# Altium PCB PCB2.PcbDoc
Units mil, origin at the board's own origin, x right, y up, seen from the top; angles counter-clockwise.
Board outline 3700 x 4025 mil, 2 copper layers (Top Layer, Bottom Layer); 66 components, 57 nets, 326 pads, 11 vias.
Unrouted connection lines stored in the file: 60.
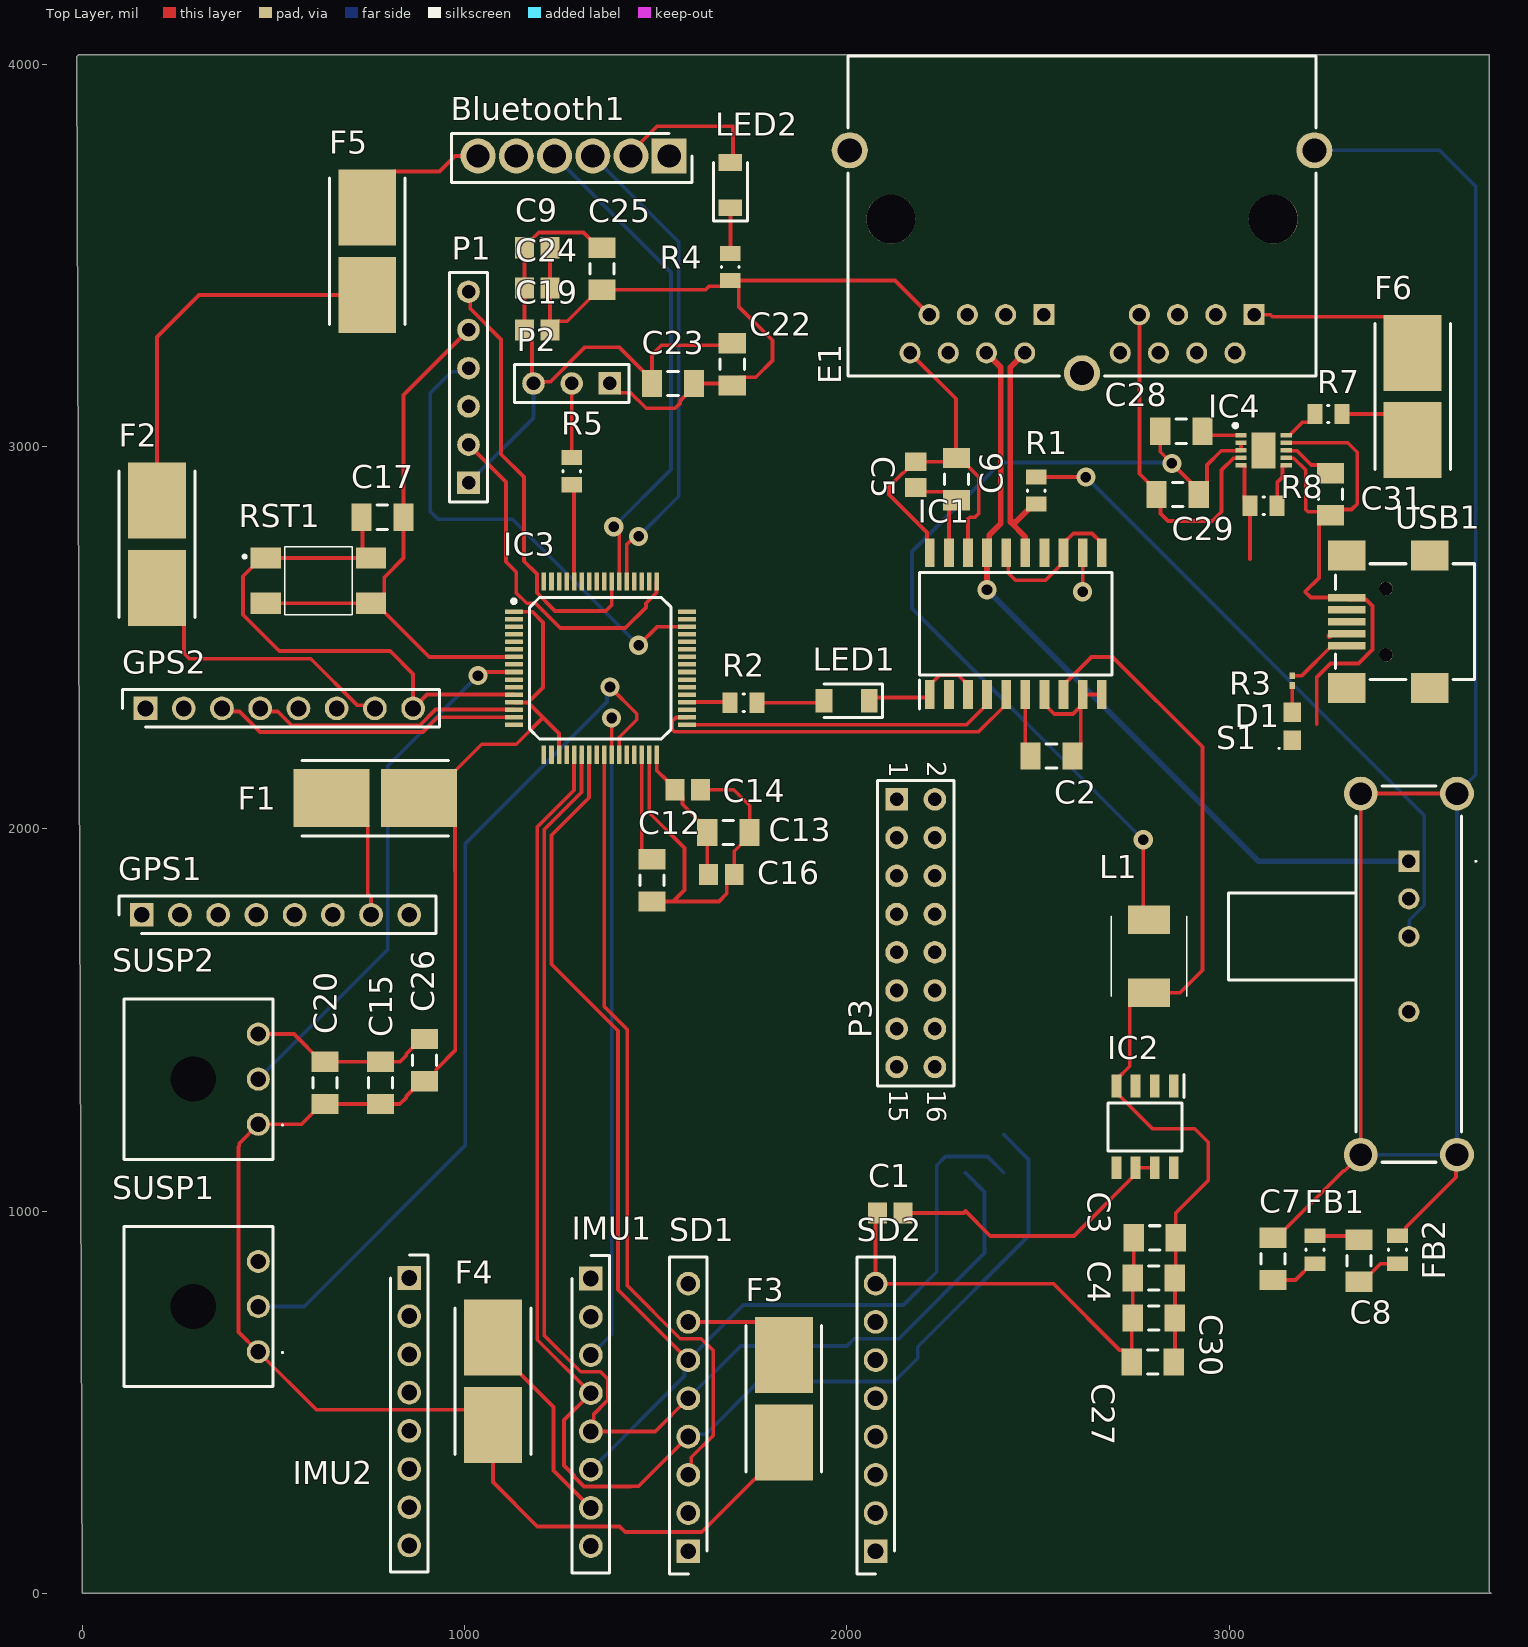
[diagram p0: Top Layer view]
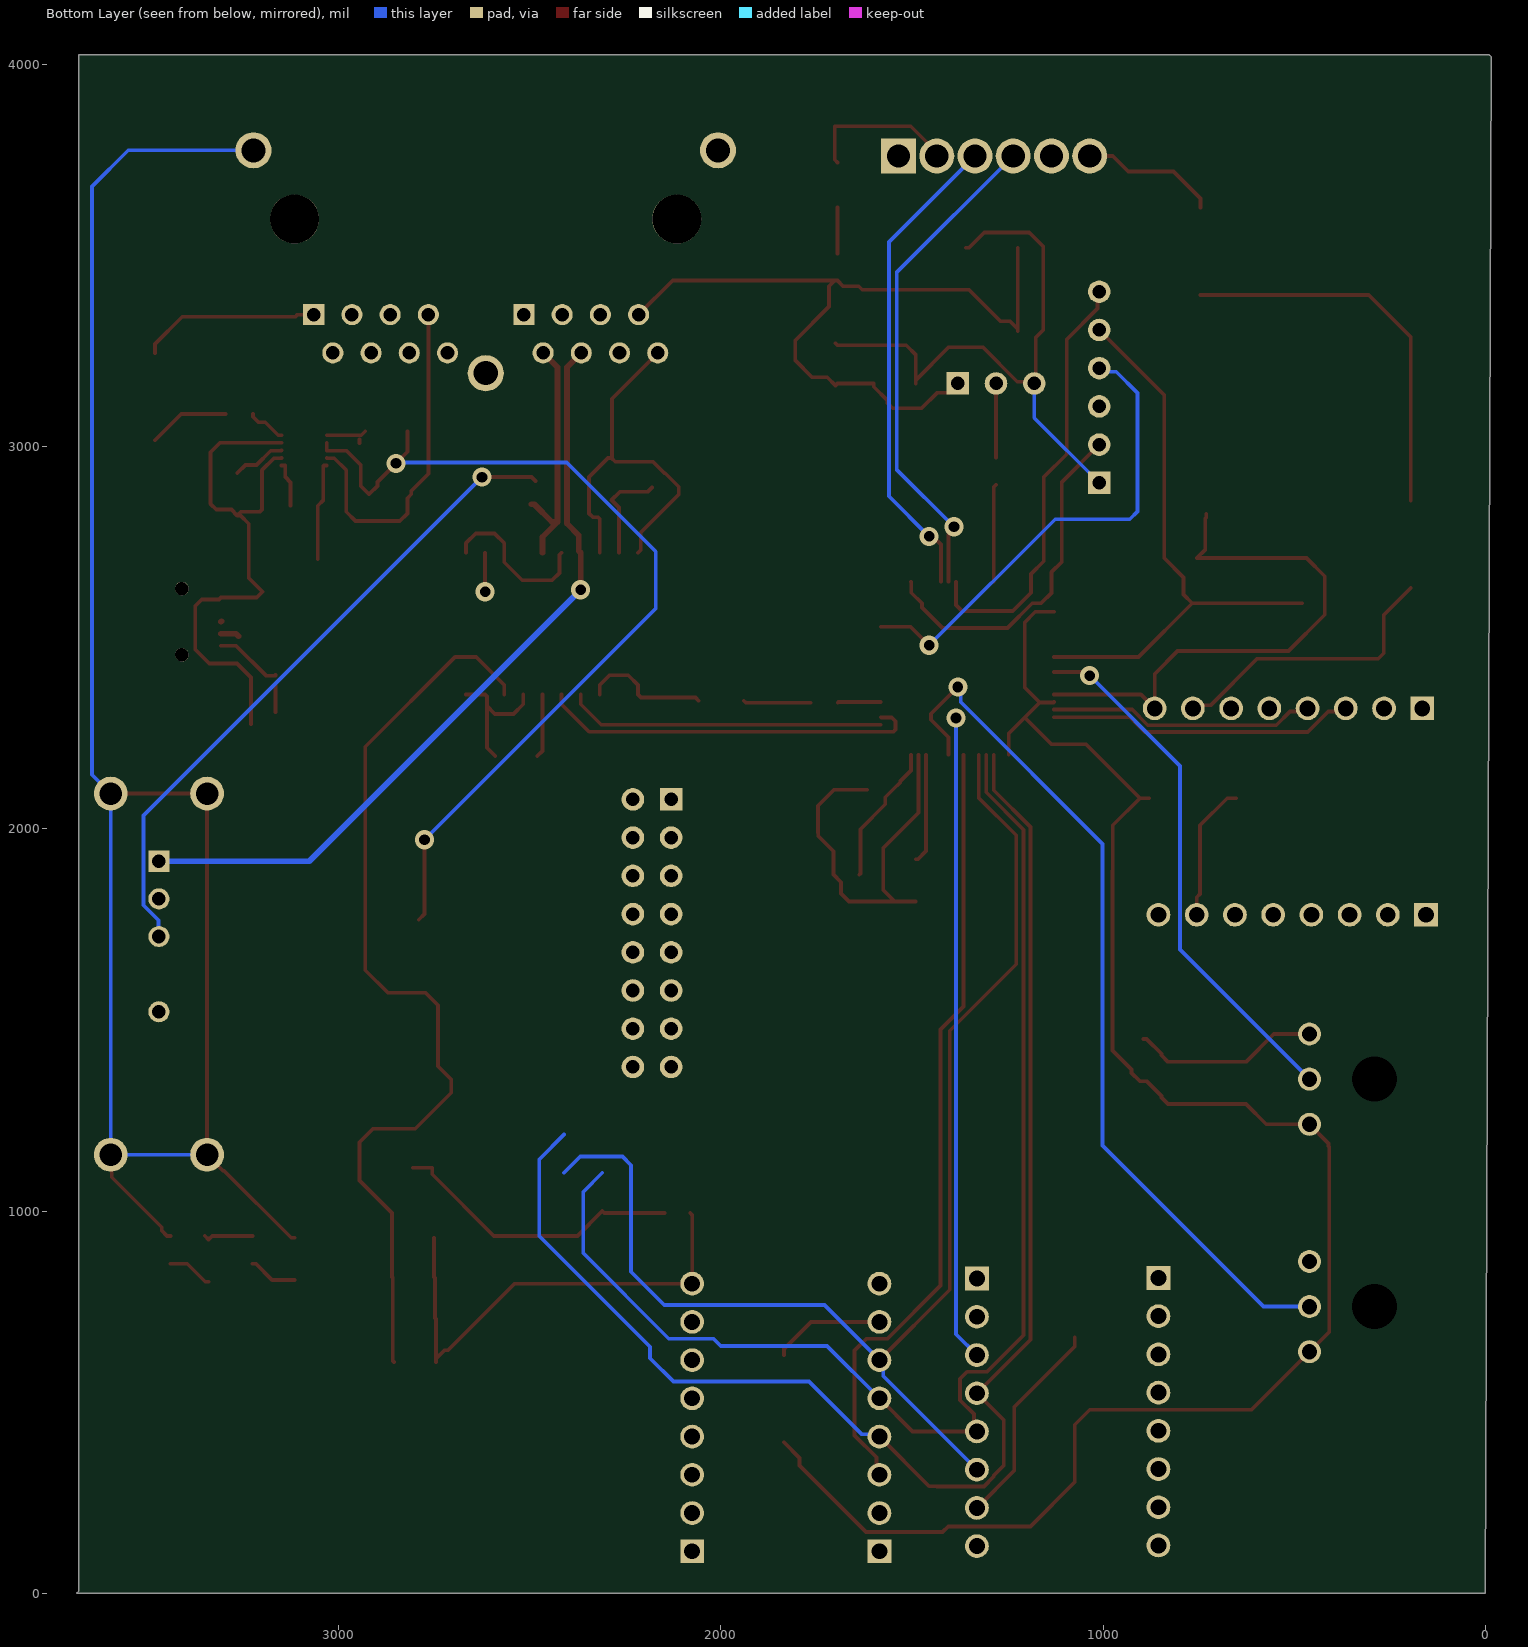
[diagram p1: Bottom Layer view, seen from below]

## Layer stack, top to bottom
Top Solder: solder mask 0.4, Solder Resist, Dk 3.5
Top Layer: signal copper 1.4
Dielectric 1: dielectric 12.6, FR-4, Dk 4.8
Bottom Layer: signal copper 1.4
Bottom Solder: solder mask 0.4, Solder Resist, Dk 3.5

## Board outline
-15,4020 -10,4025 3680,4025 3680,5 3685,0 0,0

## Design rules (kind name [scope] priority, off if disabled: settings)
BoardOutlineClearance [All] p1: gap=7.87 ignorepadtopadclearanceinfootprint=FALSE except(15.75: Arc-SplitBarrior Arc-SplitContinuation Track-SplitBarrior Track-SplitContinuation SMDPad-SplitBarrior SMDPad-SplitContinuation THPad-SplitBarrior THPad-SplitContinuation Via-SplitBarrior Via-SplitContinuation Fill-SplitBarrior Fill-SplitContinuation Poly-SplitBarrior Poly-SplitContinuation Region-SplitBarrior Region-SplitContinuation Text-SplitBarrior Text-SplitContinuation)
Clearance "Clearance Bottom Layer" [OnLayer('Bottom Layer')] p1: gap=8 ignorepadtopadclearanceinfootprint=TRUE except(10: Arc-Text Track-Text SMDPad-Text THPad-Text Via-Text Fill-Text Poly-Text Region-Text Text-Text)
Clearance "Clearance Top Layer" [OnLayer('Top Layer')] p2: gap=8 ignorepadtopadclearanceinfootprint=TRUE except(7.72: Arc-SMDPad Track-SMDPad; 7.99: Arc-Arc Arc-Track Track-Track SMDPad-SMDPad SMDPad-THPad THPad-THPad; 10: Arc-Text Track-Text SMDPad-Text THPad-Text Via-Text Fill-Text Poly-Text Region-Text Text-Text)
Clearance [All] p3: gap=7.87 ignorepadtopadclearanceinfootprint=FALSE except(3.5: Arc-Arc Arc-Track Arc-SMDPad Track-Track Track-SMDPad SMDPad-SMDPad; 5: Arc-Via Track-Via SMDPad-Via THPad-Via Via-Via; 10: Arc-Text Track-Text SMDPad-Text THPad-Text Via-Text Fill-Text Poly-Text Region-Text Text-Text)
DiffPairsRouting [All] p1: maxlimit=10 minlimit=10 mostfreqgap=10 toplayer_minwidth=9.84 toplayer_maxwidth=15 toplayer_prefwidth=15 bottomlayer_minwidth=9.84 bottomlayer_maxwidth=15 bottomlayer_prefwidth=15 maxuncoupledlength=500
HoleSize [All] p1: absolutevalues=TRUE maxlimit=248.03 minlimit=7.87 maxpercent=80.000 minpercent=20.000
MinimumAnnularRing [All] p1: minimumring=3
MinimumSolderMaskSliver [All] p1: minsoldermaskwidth=3.94
PolygonConnect PolygonConnect_1 [All] p1: thpad.connectstyle=Relief thpad.reliefconductorwidth=20 thpad.reliefentries=4 thpad.polygonreliefangle="90 Angle" thpad.airgapwidth=10 smdpad.connectstyle=Relief smdpad.reliefconductorwidth=20 smdpad.reliefentries=4 smdpad.polygonreliefangle="90 Angle" smdpad.airgapwidth=10 via.connectstyle=Direct via.reliefconductorwidth=20 via.reliefentries=4 via.polygonreliefangle="90 Angle" via.airgapwidth=10
RoomDefinition "Supply_ (1)" [InComponentClass('Supply_ (1)')] p1: confinementstyle=ConfineIn formatcopy=TRUE lockcomponents=FALSE outline 3735,3705 8215,3705 8215,4265 3735,4265
RoomDefinition "MCU (2)" [InComponentClass('MCU (2)')] p2: confinementstyle=ConfineIn formatcopy=TRUE lockcomponents=FALSE outline 3735,2590 10085,2590 10085,3655 3735,3655
RoomDefinition Componentes [InComponentClass('Componentes')] p3: confinementstyle=ConfineIn formatcopy=TRUE lockcomponents=FALSE outline 3735,1570 8765,1570 8765,2540 3735,2540
RoomDefinition CAN [InComponentClass('CAN')] p4: confinementstyle=ConfineIn formatcopy=TRUE lockcomponents=FALSE outline 3735,85 8330,85 8330,1525 3735,1525
RoutingCorners [All] p1: cornerstyle=Round minsetback=100 maxsetback=100
RoutingVias [All] p1: holewidth=19.68 width=39.37 viastyle="Through Hole" minholewidth=7.87 minwidth=17.72 maxholewidth=39.37 maxwidth=78.74
SilkToSilkClearance [All] p1: silktosilkclearance=3.94
SilkToSolderMaskClearance [IsPad] p1: minsilkscreentomaskgap=3.94 clearancetoexposedcopper=TRUE
SolderMaskExpansion [All] p1: expansion=4
Width [All] p1: maxlimit=100 minlimit=3.5 preferedwidth=9.84 minimp=50.000000 maximp=50.000000 favimp=50.000000
24 further rules are at their usual default settings.

## Classes and differential pairs
component class "Supply_ (1)": C26 C27 C28 C29 C30 C31 D1 F6 IC2 IC4 L1 R3 R7 R8 USB1
component class "MCU (2)": C9 C12 C13 C14 C15 C16 C17 C19 C20 C22 C23 C24 C25 IC3 LED1 P1 P2 P3 R2 R5 RST1
component class Componentes: Bluetooth1 F1 F2 F3 F4 F5 GPS1 GPS2 IMU1 IMU2 LED2 R4 SD1 SD2 SUSP1 SUSP2
component class CAN: C1 C2 C3 C4 C5 C6 C7 C8 E1 FB1 FB2 IC1 R1 S1
differential pair CAN: +CAN_P -CAN_N

## Components (designator, comment, footprint, x,y, rotation, side; value= is the part's Value field where it differs from the comment)
Bluetooth1 "61300611821" RHDR6W97P0X254_1X6_1574X250X865P 1535,3760 r180 top
C1 "10nF,+3.3V" "C 0805" 2113.46,994.76 r0 top
C2 "100nF,+3.3V" "C 1206" 2535.12,2190.24 r180 top
C3 "100nF,+5V" "C 1206" 2805.12,930 r0 top
C4 "10uF, +5V" "C 1206" 2802.83,825 r0 top
C5 "10nF,+5V" "C 0805" 2180,2926.54 r270 top
C6 "100nF,+5V" "C 1206" 2286.14,2914.88 r270 top
C7 "100nF,+5V" "C 1206" 3115,874.88 r270 top
C8 "10uF, +5V" "C 1206" 3340,870.12 r90 top
C9 "Cap" "C 0805" 1190,3520 r0 top value=10nF
C12 "4.7uF" "C 1206" 1490,1864.88 r90 top
C13 "Cap" "C 1206" 1689.88,1990 r180 top value=1uF
C14 "Cap" "C 0805" 1583.46,2102.05 r180 top value=10nF
C15 "Cap" "C 1206" 780,1335.12 r270 top value=1uF
C16 "Cap" "C 0805" 1671.54,1880 r180 top value=10nF
C17 "06035C104JAT2A" "C 1206" 784.88,2815 r0 top
C19 "Cap" "C 0805" 1190,3305 r180 top value=10nF
C20 "Cap" "C 1206" 635,1335.12 r270 top value=1uF
C22 "Cap" "C 1206" 1700,3214.88 r90 top value=1uF
C23 "Cap" "C 1206" 1544.88,3165 r180 top value=1uF
C24 "Cap" "C 0805" 1190,3415 r180 top value=10nF
C25 "Cap" "C 1206" 1359.53,3465.12 r270 top value=1uF
C26 "10uF" "C 1206" 895,1394.88 r270 top
C27 "100nF, 25V" "C 1206" 2800.12,605 r0 top
C28 "0.1uF, 25V" "C 1206" 2874.88,3040 r0 top
C29 "4.7pF, 25V" "C 1206" 2865,2875 r0 top
C30 "10uF,25V" "C 1206" 2802.83,720 r180 top
C31 "2.2pF, 25V" "C 1206" 3265.31,2875 r90 top
D1 "Valor" "LED 0805" 3165,2268.58 r90 top
E1 "615016137621" Ethernet2 2615,3603.46 r180 top
F1 "015401.5DR" "Fuse Holder" 765.83,2080.99 r180 top
F2 "015401.5DR" "Fuse Holder" 194.01,2744.18 r270 top
F3 "015401.5DR" "Fuse Holder" 1835.99,509.17 r90 top
F4 "015401.5DR" "Fuse Holder" 1075,555 r90 top
F5 "015401.5DR" "Fuse Holder" 745.99,3510.82 r90 top
F6 "015401.5DRT" "Fuse Holder" 3480.99,3130.82 r90 top
FB1 "1800Ohm, 1A" "F 0805" 3225,898.58 r90 top
FB2 "1800Ohm, 1A" "F 0805" 3440,898.58 r270 top
GPS1 "5-535541-6" RHDR8W60P0X254_1X8_2082X250X850P 155,1775 r0 top
GPS2 "5-535541-6" RHDR8W60P0X254_1X8_2082X250X850P 165,2315 r0 top
IC1 "ADM3053BRWZ" SOIC127P1032X265-20N 2441.63,2536.61 r90 top
IC2 "LD1117D33TR" SOIC127P600X175-8N 2780,1220 r270 top
IC3 "STM32F446RET7" "Pins 1.2mm" 1355,2420 r0 top
IC4 "MAX16903SATB50_V+T" SON50P300X300X80-11N 3090,2990 r0 top
IMU1 "5-535541-6" RHDR8W60P0X254_1X8_2082X250X850P 1330,823.35 r270 top
IMU2 "5-535541-6" RHDR8W60P0X254_1X8_2082X250X850P 855,825 r270 top
L1 "4.7uH" MPX1D0530L150 2790,1666.42 r90 top
LED1 "150120GS75000" LEDC3214X78N 1999.06,2335 r180 top
LED2 "150120GS75000" LEDC3214X78N 1695,3684.06 r90 top
P1 "Header 6" HDR1X6 1010,2905 r90 top
P2 "Header 3" HDR1X3 1380,3165 r180 top
P3 "Header 8X2" HDR2X8 2130,2076.89 r270 top
R1 "120R,+5V" "R 0805" 2495,2884.57 r90 top
R2 "LED3.3V" "R 0805" 1729.57,2330 r180 top
R3 "1k" "R 0201" 3165,2387.8 r270 top
R4 "LED3.3V" "R 0805" 1695,3469.57 r90 top
R5 "10K" "R 0805" 1280,2935.43 r90 top
R7 "33k" "R 0805" 3259.57,3085 r180 top
R8 "20k" "R 0805" 3090,2845 r0 top
RST1 "430181038816" 430181038816 617.2,2649.06 r0 top
S1 "MSS1300R04" MSS1300R04 3470,1915 r270 top
SD1 "5-535541-6" RHDR8W60P0X254_1X8_2082X250X850P 1585,110 r90 top
SD2 "5-535541-6" RHDR8W60P0X254_1X8_2082X250X850P 2075,110 r90 top
SUSP1 "66200311022" 66200311022 460.08,631.89 r270 top
SUSP2 "66200311022" 66200311022 460.08,1226.89 r270 top
USB1 "WE-Communication Connectors 651005136421" 65100516121 3410,2455.16 r90 top

## Footprints (in the part's own frame and the unit in brackets; to place one, negate y for a bottom-side part, rotate by r counter-clockwise, add the part's x,y. Pads: shape width x height; smd on the part's side, far side on the other; paste and mask are expansions set on the pad)
65100516121 [mm]
  rect 0.5x2.5 smd: 1(0.6,2.6) 2(1.4,2.6) 3(2.2,2.6) 4(3,2.6) 5(3.8,2.6)
  rect 2x2.5 smd: ""(-2.2,-2.9) ""(-2.2,2.6) ""(6.6,-2.9) ""(6.6,2.6)
  round 0.9 hole 0.9 unplated: ""(0,0) ""(4.4,0)
  silkscreen extent -1.65,-5.9 6.05,3.35, body extent -2.6,-5.9 7,3.35, height 3.92
66200311022 [mm]
  round 1.53 hole 1.02: 1(0,0) 2(-3,0) 3(-6,0)
  round 1.5 hole 3 unplated: MH1(-3,-4.32)
  silkscreen extent -8.32,-8.92 2.32,1.65, body extent -8.32,-8.92 2.32,0.98, height 5.82
430181038816 [mm]
  rect 2x1.4 smd: 1(-3.5,1.5) 2(3.5,1.5) 3(-3.5,-1.5) 4(3.5,-1.5)
  silkscreen extent -5,-2.25 2.25,2.25
"C 0805" [mm] "Chip Capacitor, 2-Leads, Body 2,00x1,25mm, IPC Medium Density"
  rect 1.25x1.4 smd: 1(-0.85,0) 2(0.85,0)
  body extent -1.08,-0.67 1.07,0.67, height 0.9
"C 1206" [mm] "Chip Capacitor, 2-Leads, Body 3,20x1,60mm, IPC Medium Density"
  rect 1.35x1.8 smd: 1(-1.4,0) 2(1.4,0)
  silkscreen extent -0.35,-0.8 0.35,0.8, body extent -1.68,-0.87 1.68,0.87, height 0.9
Ethernet2 [mm]
  rect 1.4x1.4 hole 0.9: A1(-11.43,6.565) B1(2.54,6.565)
  round 1.4 hole 0.9: A2(-10.16,9.105) A3(-8.89,6.565) A4(-7.62,9.105) A5(-6.35,6.565) A6(-5.08,9.105) A7(-3.81,6.565) A8(-2.54,9.105) B2(3.81,9.105) B3(5.08,6.565) B4(6.35,9.105) B5(7.62,6.565) B6(8.89,9.105) B7(10.16,6.565) B8(11.43,9.105)
  round 3.25 hole 3.25 unplated: MH1(-12.7,0.215) MH2(12.7,0.215)
  round 2.4 hole 1.6: S1(-15.435,-4.355) S2(15.435,-4.355) S3(0,10.455)
  silkscreen extent -15.56,-10.64 15.56,10.63, body extent -15.57,-10.64 15.56,10.63, height 13.75
"F 0805" [mm] "Chip Resistor, 2-Leads, Body 2,00x1,25mm, IPC Medium Density"
  rect 0.95x1.4 smd: 1(-0.925,0) 2(0.925,0)
  silkscreen extent -0.05,-0.6 0.05,0.6, body extent -1.05,-0.7 1.05,0.7, height 0.55
"Fuse Holder" [mm]
  rect 5.05x3.85 smd: 1(-2.9,0.025) 2(2.9,0.025)
  silkscreen extent -4.86,-2.49 4.87,2.54, body extent -4.86,-2.51 4.87,2.52, height 3.82
HDR1X3 [mm] "Connector; Header; 3 Position"
  rect 1.5x1.5 hole 0.9: 1(0,0)
  round 1.5 hole 0.9: 2(2.54,0) 3(5.08,0)
  silkscreen extent -1.27,-1.27 6.35,1.27
HDR1X6 [mm] "Connector; Header; 6 Position"
  rect 1.5x1.5 hole 0.9: 1(0,0)
  round 1.5 hole 0.9: 2(2.54,0) 3(5.08,0) 4(7.62,0) 5(10.16,0) 6(12.7,0)
  silkscreen extent -1.27,-1.27 13.97,1.27
HDR2X8 [mm] "Connector; Header; 8x2 Position"
  rect 1.5x1.5 hole 0.9: 1(0,0)
  round 1.5 hole 0.9: 2(0,2.54) 3(2.54,0) 4(2.54,2.54) 5(5.08,0) 6(5.08,2.54) 7(7.62,0) 8(7.62,2.54) 9(10.16,0) 10(10.16,2.54) 11(12.7,0) 12(12.7,2.54) 13(15.24,0) 14(15.24,2.54) 15(17.78,0) 16(17.78,2.54)
  silkscreen extent -1.27,-1.27 19.05,3.81
"LED 0805" [mm] "Molded Diode, 2-Leads, Body 2,00x1,25mm, IPC Medium Density"
  rect 1.3x1.15 smd: 1(-0.925,0) 2(0.925,0)
  silkscreen extent -1.52,0.82 -1.43,0.92, body extent -1.05,-0.67 1.05,0.67, height 1.1
LEDC3214X78N [mm]
  rect 1.1x1.55 smd: 1(-1.5,0) 2(1.5,0)
  silkscreen extent -2.4,-1.12 1.5,1.12, body extent -1.6,-0.8 1.6,0.8, height 0.68
MPX1D0530L150 [mm]
  rect 1.905x2.79 smd: 1(-2.425,0) 2(2.425,0)
  silkscreen extent -2.65,-2.5 2.65,2.5, body extent -3.19,-2.5 3.19,2.5, height 3.1
MSS1300R04 [mm]
  rect 1.4x1.4 hole 0.9: 1(0,0)
  round 1.4 hole 0.9: 2(2.5,0) 3(5,0) 4(10,0)
  round 2.25 hole 1.5: MH1(-4.5,-3.2) MH2(-4.5,3.2) MH3(19.5,3.2) MH4(19.5,-3.2)
  silkscreen extent -5,-12 20,4.5, body extent -5.14,-3.85 20.15,3.85, height 11.4
"Pins 1.2mm" [mm] "CQFP, 64-Leads, Body 12,00x12,00mm, Pitch 0,50mm, IPC Medium Density"
  rect 1.2x0.3 smd: 1(-5.75,3.75) 2(-5.75,3.25) 3(-5.75,2.75) 4(-5.75,2.25) 5(-5.75,1.75) 6(-5.75,1.25) 7(-5.75,0.75) 8(-5.75,0.25) 9(-5.75,-0.25) 10(-5.75,-0.75) 11(-5.75,-1.25) 12(-5.75,-1.75) 13(-5.75,-2.25) 14(-5.75,-2.75) 15(-5.75,-3.25) 16(-5.75,-3.75) 33(5.75,-3.75) 34(5.75,-3.25) 35(5.75,-2.75) 36(5.75,-2.25) 37(5.75,-1.75) 38(5.75,-1.25) 39(5.75,-0.75) 40(5.75,-0.25) 41(5.75,0.25) 42(5.75,0.75) 43(5.75,1.25) 44(5.75,1.75) 45(5.75,2.25) 46(5.75,2.75) 47(5.75,3.25) 48(5.75,3.75)
  rect 0.3x1.2 smd: 17(-3.75,-5.75) 18(-3.25,-5.75) 19(-2.75,-5.75) 20(-2.25,-5.75) 21(-1.75,-5.75) 22(-1.25,-5.75) 23(-0.75,-5.75) 24(-0.25,-5.75) 25(0.25,-5.75) 26(0.75,-5.75) 27(1.25,-5.75) 28(1.75,-5.75) 29(2.25,-5.75) 30(2.75,-5.75) 31(3.25,-5.75) 32(3.75,-5.75) 49(3.75,5.75) 50(3.25,5.75) 51(2.75,5.75) 52(2.25,5.75) 53(1.75,5.75) 54(1.25,5.75) 55(0.75,5.75) 56(0.25,5.75) 57(-0.25,5.75) 58(-0.75,5.75) 59(-1.25,5.75) 60(-1.75,5.75) 61(-2.25,5.75) 62(-2.75,5.75) 63(-3.25,5.75) 64(-3.75,5.75)
  silkscreen extent -5.87,-4.7 4.7,4.7, body extent -5,-5 5,5, height 1.6
"R 0201" [mm] "Chip Resistor, 2-Leads, Body 0,60x0,30mm, IPC Medium Density"
  rect 0.45x0.35 smd: 1(-0.325,0) 2(0.325,0)
  body extent -0.32,-0.16 0.32,0.17, height 0.26
"R 0805" [mm] "Chip Resistor, 2-Leads, Body 2,00x1,25mm, IPC Medium Density"
  rect 1x1.35 smd: 1(-0.9,0) 2(0.9,0)
  silkscreen extent -0.05,-0.58 0.05,0.58, body extent -1.05,-0.67 1.05,0.67, height 0.6
RHDR6W97P0X254_1X6_1574X250X865P [mm]
  rect 2.325x2.325 hole 1.55: 1(0,0)
  round 2.325 hole 1.55: 2(2.54,0) 3(5.08,0) 4(7.62,0) 5(10.16,0) 6(12.7,0)
  silkscreen extent -1.52,-1.51 14.47,1.78, body extent -1.52,-1.25 14.22,1.25, height 8.65
RHDR8W60P0X254_1X8_2082X250X850P [mm]
  rect 1.575x1.575 hole 1.05: 1(0,0)
  round 1.575 hole 1.05: 2(2.54,0) 3(5.08,0) 4(7.62,0) 5(10.16,0) 6(12.7,0) 7(15.24,0) 8(17.78,0)
  silkscreen extent -1.52,-1.25 19.55,1.25, body extent -1.52,-1.25 19.3,1.25, height 8.5
SOIC127P600X175-8N [mm]
  rect 1.525x0.65 smd: 1(-2.712,1.905) 2(-2.712,0.635) 3(-2.712,-0.635) 4(-2.712,-1.905) 5(2.712,-1.905) 6(2.712,-0.635) 7(2.712,0.635) 8(2.712,1.905)
  silkscreen extent -3.47,-2.45 1.6,2.58, body extent -3,-2.45 3,2.45, height 1.75
SOIC127P1032X265-20N [mm]
  rect 1.925x0.65 smd: 1(-4.712,5.715) 2(-4.712,4.445) 3(-4.712,3.175) 4(-4.712,1.905) 5(-4.712,0.635) 6(-4.712,-0.635) 7(-4.712,-1.905) 8(-4.712,-3.175) 9(-4.712,-4.445) 10(-4.712,-5.715) 11(4.712,-5.715) 12(4.712,-4.445) 13(4.712,-3.175) 14(4.712,-1.905) 15(4.712,-0.635) 16(4.712,0.635) 17(4.712,1.905) 18(4.712,3.175) 19(4.712,4.445) 20(4.712,5.715)
  silkscreen extent -5.68,-6.4 3.4,6.4, body extent -5.16,-6.4 5.16,6.4, height 2.65
SON50P300X300X80-11N [mm]
  rect 0.75x0.3 smd: 1(-1.5,1) 2(-1.5,0.5) 3(-1.5,0) 4(-1.5,-0.5) 5(-1.5,-1) 6(1.5,-1) 7(1.5,-0.5) 8(1.5,0) 9(1.5,0.5) 10(1.5,1)
  rect 1.6x2.4 smd: 11(0,0)
  silkscreen extent -2,1.53 -1.75,1.77, body extent -1.55,-1.5 1.55,1.5, height 0.8

## Part data
Bluetooth1: "Connector", Manufacturer_Name="Wurth Elektronik", Mouser Part Number=710-61300611821, Datasheet Link=https://www.we-online.de/katalog/datasheet/61300611821.pdf, Height=8.65mm, Manufacturer_Part_Number=61300611821, Mouser Price/Stock=https://www.mouser.co.uk/ProductDetail/Wurth-Elektronik/61300611821?qs=iLbezkQI%252BsgS21jF2eozhA%3D%3D
C1 C5: library part 885012207126_6, "WCAP-CSGP Multilayer Ceramic Chip Capacitor, General Purpose, size 0805, X7R, 47nF, 100V", Capacitance=47nF, Capacitance Tolerance=+/-10%, Isolation Resistance=>=2.1GOhm, Manufacturer="Wurth Elektronik", Manufacturer Part Number=885012207126, Operating Temperature="-55 to +125degC", Rated Voltage=100VDC, Ceramic Type=X7R, ComponentLink1Description=Manufacturer, ComponentLink1URL=http://www.we-online.de, ComponentLink2Description=Datasheet, ComponentLink2URL=https://www.we-online.com/catalog/datasheet/885012207126.pdf, Dissipation Factor=#NAME?, Height=1.25mm, Mounting Technology=SMT, Packaging="Tape and Reel", Published Date="May 2020", Size=0805, Technical Reference=X7R0805473K100DFCT10000
C2: library part 885012208015_1, "WCAP-CSGP General Purpose Ceramic Capacitors, size 1206, 2.2uF, +/-10%, 10VDC", Capacitance=2.2uF, Capacitance Tolerance=+/-10%, Isolation Resistance=>=0.2GOhm, Operating Temperature="-55 to +125degC", Part Number=885012208015, Rated Voltage=10VDC, Ceramic Type=X7R, ComponentLink1Description=Manufacturer, ComponentLink1URL=http://www.we-online.de, ComponentLink2Description=Datasheet, ComponentLink2URL=https://katalog.we-online.com/pbs/datasheet/885012208015.pdf, Dissipation Factor=#NAME?, Height="1.15mm +/-0.15mm", Mounting Technology=SMT, Packaging="Tape and Reel", Published Date="August 2019", Publisher="Wurth Elektronik", Size=1206, Technical Reference=X7R1206225K010DFCT10000
C3 C6 C7: library part 885012208013_4, "WCAP-CSGP General Purpose Ceramic Capacitors, size 1206, 1uF, +/-10%, 10VDC", Capacitance=1uF, Capacitance Tolerance=+/-10%, Isolation Resistance=>=0.5GOhm, Operating Temperature="-55 to +125degC", Part Number=885012208013, Rated Voltage=10VDC, Ceramic Type=X7R, ComponentLink1Description=Manufacturer, ComponentLink1URL=http://www.we-online.de, ComponentLink2Description=Datasheet, ComponentLink2URL=https://katalog.we-online.com/pbs/datasheet/885012208013.pdf, Dissipation Factor=#NAME?, Height="1.15mm +/-0.15mm", Mounting Technology=SMT, Packaging="Tape and Reel", Published Date="August 2019", Publisher="Wurth Elektronik", Size=1206, Technical Reference=X7R1206105K010DFCT10000
C4 C8: library part 885012208013_5, "WCAP-CSGP General Purpose Ceramic Capacitors, size 1206, 1uF, +/-10%, 10VDC", Capacitance=1uF, Capacitance Tolerance=+/-10%, Isolation Resistance=>=0.5GOhm, Operating Temperature="-55 to +125degC", Part Number=885012208013, Rated Voltage=10VDC, Ceramic Type=X7R, ComponentLink1Description=Manufacturer, ComponentLink1URL=http://www.we-online.de, ComponentLink2Description=Datasheet, ComponentLink2URL=https://katalog.we-online.com/pbs/datasheet/885012208013.pdf, Dissipation Factor=#NAME?, Height="1.15mm +/-0.15mm", Mounting Technology=SMT, Packaging="Tape and Reel", Published Date="August 2019", Publisher="Wurth Elektronik", Size=1206, Technical Reference=X7R1206105K010DFCT10000
C9 C13 C14 C15 C16 C19 C20 C22 C23 C24 C25: "Capacitor", LatestRevisionDate=17-Jul-2002, LatestRevisionNote="Re-released for DXP Platform.", PackageDescription="Radial Cap, Thru-Hole; 2 Leads; 0.3 in Pin Spacing", PackageReference=RAD-0.3, Published=8-Jun-2000, Publisher="Altium Limited"
C12: library part 885012208013, "WCAP-CSGP Multilayer Ceramic Chip Capacitor, General Purpose, size 1206, X7R, 1uF, 10V", Capacitance=1uF, Capacitance Tolerance=+/-10%, Isolation Resistance=>=0.5GOhm, Manufacturer="Wurth Elektronik", Operating Temperature="-55 to +125degC", Rated Voltage=10VDC, Ceramic Type=X7R, ComponentLink1Description=Manufacturer, ComponentLink1URL=http://www.we-online.de, ComponentLink2Description=Datasheet, ComponentLink2URL=https://www.we-online.com/catalog/datasheet/885012208013.pdf, Dissipation Factor=#NAME?, Height=1.15mm, Manufacturer Part Number=885012208013, Mounting Technology=SMT, Packaging="Tape and Reel", Published Date="May 2020", Size=1206, Technical Reference=X7R1206105K010DFCT10000
C17: "Capacitor,100nf,+3.3V,1206", Manufacturer_Name=AVX, Mouser Part Number=581-06035C104JAT2A, Arrow Part Number=06035C104JAT2A, Arrow Price/Stock=https://www.arrow.com/en/products/06035c104jat2a/avx, Datasheet Link=http://www.mouser.com/catalog/supplier/library/pdf/AVXSurfaceMountCeramic.pdf, Height=0.9mm, Manufacturer_Part_Number=06035C104JAT2A, Mouser Price/Stock=https://www.mouser.co.uk/ProductDetail/AVX/06035C104JAT2A/?qs=EbDiPP9peV%252BVb%2FIEcsjONQ%3D%3D
C26 C27 C28 C29 C30 C31: library part Condensador, "Condensador"
D1: library part LED, "LED"
E1: "WR-MJ Modular Jack THT Horizontal Shielded Dual Port 8P8C Tab Down", Contact Resistance=20mOhm, Insulation Resistance=500MOhm, Operating Temperature="-40 to +85degC", Rated Current=1.5A, Withstanding Voltage=1000VAC, Working Voltage=120VAC, ComponentLink1Description=Manufacturer, ComponentLink1URL=http://www.we-online.de, ComponentLink2Description=Datasheet, ComponentLink2URL=https://katalog.we-online.com/em/datasheet/615016137621.pdf, Mounting Technology=THT, Packaging=Tray, Part Number=615016137621, Published Date="November 2019", Publisher="Wurth Elektronik", Type=Horizontal, xPxC=8P8C
F1 F2 F3 F4 F5: "Fuse", Manufacturer_Name=LITTELFUSE, Mouser Part Number=576-015401.5DR, RS Part Number=7382879P, Allied_Number=70519132, Allied Price/Stock=https://www.alliedelec.com/littelfuse-015401-5dr/70519132/, Datasheet Link=https://www.littelfuse.com/~/media/electronics/datasheets/fuses/littelfuse_fuse_154_154t_154l_154tl_datasheet.pdf.pdf, Height=3.81mm, Manufacturer_Part_Number=015401.5DR, Mouser Price/Stock=https://www.mouser.com/Search/Refine.aspx?Keyword=576-015401.5DR, RS Price/Stock=http://uk.rs-online.com/web/p/products/7382879P
F6: "Fuse", Manufacturer_Name=LITTELFUSE, Mouser Part Number=576-015401.5DRT, Arrow Part Number=015401.5DRT, Arrow Price/Stock=https://www.arrow.com/en/products/015401.5drt/littelfuse?region=nac, Datasheet Link=https://componentsearchengine.com/Datasheets/2/015401.5DRT.pdf, Height=3.81mm, Manufacturer_Part_Number=015401.5DRT, Mouser Price/Stock=https://www.mouser.co.uk/ProductDetail/Littelfuse/015401.5DRT?qs=gu7KAQ731USSn8iq6YrVPw%3D%3D
FB1 FB2: library part 742792090, "WE-CBF SMT EMI Suppression Ferrite Bead, size 0805, 1800Ohm, 1A", DC Resistance max.=0.4Ohm, Manufacturer="Wurth Elektronik", Operating Temperature="-55 to +125degC", Rated Current=1A, ComponentLink1Description=Manufacturer, ComponentLink1URL=http://www.we-online.de, ComponentLink2Description=Datasheet, ComponentLink2URL=https://www.we-online.com/catalog/datasheet/742792090.pdf, Impedance @100MHz=1800Ohm, Impedance max.=2000Ohm, Manufacturer Part Number=742792090, Mounting Technology=SMT, Packaging="Tape and Reel", Published Date="March 2020", Size=0805, Type="Wide Band"
GPS1 GPS2 IMU1 IMU2 SD1 SD2: "Connector Socket Strip RCP 8 POS 2.54mm Solder ST Thru-Hole Gang of Tubes", Package=None, Availability=Unavailable, MF="TE Connectivity", MP=5-535541-6, Price=None, SnapEDA_Link=https://www.snapeda.com/parts/5-535541-6/TE%20Connectivity%20AMP%20Connectors/view-part/497141/?ref=snap
IC1: "Integrated Circuit", Manufacturer_Name="Analog Devices", Mouser Part Number=584-ADM3053BRWZ, Arrow Part Number=ADM3053BRWZ, Arrow Price/Stock=https://www.arrow.com/en/products/adm3053brwz/analog-devices?region=nac, Datasheet Link=https://componentsearchengine.com/Datasheets/2/ADM3053BRWZ.pdf, Height=2.65mm, Manufacturer_Part_Number=ADM3053BRWZ, Mouser Price/Stock=https://www.mouser.co.uk/ProductDetail/Analog-Devices/ADM3053BRWZ?qs=BpaRKvA4VqGZYG1hZ9cdqw%3D%3D
IC2: "Integrated Circuit", Manufacturer_Name=STMicroelectronics, Mouser Part Number=511-LD1117D33-TR, Arrow Part Number=LD1117D33TR, Arrow Price/Stock=https://www.arrow.com/en/products/ld1117d33tr/stmicroelectronics, Datasheet Link=http://www.st.com/st-web-ui/static/active/en/resource/technical/document/datasheet/CD00000544.pdf, Height=1.75mm, Manufacturer_Part_Number=LD1117D33TR, Mouser Price/Stock=https://www.mouser.co.uk/ProductDetail/STMicroelectronics/LD1117D33TR?qs=8YYpzd7qSxIl%2FiC6F%2FA2nA%3D%3D
IC3: "Integrated Circuit", Manufacturer_Name=STMicroelectronics, Mouser Part Number=511-STM32F446RET7, Arrow Part Number=STM32F446RET7, Arrow Price/Stock=https://www.arrow.com/en/products/stm32f446ret7/stmicroelectronics?region=nac, Datasheet Link=https://componentsearchengine.com/Datasheets/5/STM32F446RET7.pdf, Height=1.6mm, Manufacturer_Part_Number=STM32F446RET7, Mouser Price/Stock=https://www.mouser.co.uk/ProductDetail/STMicroelectronics/STM32F446RET7?qs=qzCNEk%252BRr%252BZ3vIhuSM4Ejg%3D%3D
IC4: "Integrated Circuit", Manufacturer_Name="Maxim Integrated", Manufacturer_Part_Number=MAX16903SATB50/V+T, Datasheet Link=https://pdfserv.maximintegrated.com/en/ds/MAX16903.pdf, Height=0.8mm
L1: library part Inductor, "Inductor"
LED1 LED2: "LED", Manufacturer_Name="Wurth Elektronik", Mouser Part Number=710-150120GS75000, Height=0.78mm, Manufacturer_Part_Number=150120GS75000, Mouser Price/Stock=https://www.mouser.co.uk/ProductDetail/Wurth-Elektronik/150120GS75000?qs=LlUlMxKIyB3I3AMxrmBw4A%3D%3D
P1: "Header, 6-Pin", LatestRevisionDate=17-Jul-2002, LatestRevisionNote="Re-released for DXP Platform.", Publisher="Altium Limited"
P2: "Header, 3-Pin", LatestRevisionDate=17-Jul-2002, LatestRevisionNote="Re-released for DXP Platform.", Publisher="Altium Limited"
P3: "Header, 8-Pin, Dual row", LatestRevisionDate=17-Jul-2002, LatestRevisionNote="Re-released for DXP Platform.", Publisher="Altium Limited"
R1: library part 560050320011_9, "WRIS-KSKE SMT Thick Film Resistor, size 0805, 1Ohm, 0.33W", Manufacturer="Wurth Elektronik", Manufacturer Part Number=560050320011, Operating Temperature="-55 to +155degC", Rated Current=0.57A, Rated Power=0.33W, Resistance=1Ohm, Resistance Tolerance=+/-1%, Temperature Coefficient of Resistance=+/-100ppm/degC, ComponentLink1Description=Manufacturer, ComponentLink1URL=http://www.we-online.de, ComponentLink2Description=Datasheet, ComponentLink2URL=https://www.we-online.com/catalog/datasheet/560050320011.pdf, Height=0.6mm, Length=2mm, Mounting Technology=SMT, Packaging="Tape and Reel", Published Date="May 2020", Size=0805, Technical Reference=KE08051R00F103KAATP0000, Width=1.25mm
R2 R5: library part 560050320011, "WRIS-KSKE SMT Thick Film Resistor, size 0805, 1Ohm, 0.33W", Manufacturer="Wurth Elektronik", Operating Temperature="-55 to +155degC", Rated Current=0.57A, Rated Power=0.33W, Resistance=1Ohm, Resistance Tolerance=+/-1%, Temperature Coefficient of Resistance=+/-100ppm/degC, ComponentLink1Description=Manufacturer, ComponentLink1URL=http://www.we-online.de, ComponentLink2Description=Datasheet, ComponentLink2URL=https://www.we-online.com/catalog/datasheet/560050320011.pdf, Height=0.6mm, Length=2mm, Manufacturer Part Number=560050320011, Mounting Technology=SMT, Packaging="Tape and Reel", Published Date="May 2020", Size=0805, Technical Reference=KE08051R00F103KAATP0000, Width=1.25mm
R3 R7 R8: library part Resistencia, "Resistencia"
R4: library part 560050320011_2, "WRIS-KSKE SMT Thick Film Resistor, size 0805, 1Ohm, 0.33W", Manufacturer="Wurth Elektronik", Manufacturer Part Number=560050320011, Operating Temperature="-55 to +155degC", Rated Current=0.57A, Rated Power=0.33W, Resistance=1Ohm, Resistance Tolerance=+/-1%, Temperature Coefficient of Resistance=+/-100ppm/degC, ComponentLink1Description=Manufacturer, ComponentLink1URL=http://www.we-online.de, ComponentLink2Description=Datasheet, ComponentLink2URL=https://www.we-online.com/catalog/datasheet/560050320011.pdf, Height=0.6mm, Length=2mm, Mounting Technology=SMT, Packaging="Tape and Reel", Published Date="May 2020", Size=0805, Technical Reference=KE08051R00F103KAATP0000, Width=1.25mm
RST1: "WS-TASV SMT Tact Switch 4.5x4.5mm, height 3.8mm, 160gf", Operating Temperature="-40 to +85degC", Rated Current=50mA, Rated Voltage=12VDC, ComponentLink1Description=Manufacturer, ComponentLink1URL=http://www.we-online.de, ComponentLink2Description=Datasheet, ComponentLink2URL=https://katalog.we-online.com/em/datasheet/430181038816.pdf, Contact Material="Stainless Steel", Contact Plating=Silver, Height=3.8mm, Mounting Technology=SMT, Operation Force=160gf, Packaging="Tape and Reel", Part Number=430181038816, Published Date="September 2019", Publisher="Wurth Elektronik", Terminal Material="Copper Alloy", Terminal Plating=Silver, Washable=No
S1: "Switch", Manufacturer_Name="TE Connectivity", Mouser Part Number=506-MSS1300R04, Datasheet Link=https://www.te.com/commerce/DocumentDelivery/DDEController?Action=showdoc&DocId=Customer+Drawing%7F1825260%7FA2%7Fpdf%7FEnglish%7FENG_CD_1825260_A2.pdf%7F1825260-1, Height=11.3mm, Manufacturer_Part_Number=MSS1300R04, Mouser Price/Stock=https://www.mouser.co.uk/ProductDetail/TE-Connectivity-PB/MSS1300R04?qs=Of7OaoM7rsFDfSerl70TPw%3D%3D
SUSP1 SUSP2: "Connector", Manufacturer_Name="Wurth Elektronik", Mouser Part Number=710-66200311022, Datasheet Link=https://docs.rs-online.com/3e1f/A700000007269589.pdf, Height=5.72mm, Manufacturer_Part_Number=66200311022, Mouser Price/Stock=https://www.mouser.co.uk/ProductDetail/Wurth-Elektronik/66200311022?qs=3RJ0PdSuLVkSi7ZZT4Z8xA%3D%3D
USB1: "WR-COM Mini USB Vertical TH Type B 5 Contacts", Manufacturer="Würth Elektronik eiSos GmbH", partNo=651005136421, ComponentLink1 Description=Manufacturer, ComponentLink1URL=http://www.we-online.de, ComponentLink2 Description=Datasheet, ComponentLink2URL=http://katalog.we-online.de/em/datasheet/651005136421.pdf, Created by="Karrer Zheng", Created Date=10/10/2014, NoPins=5

## Via types
v1: diameter 50, hole 28, Top Layer to Bottom Layer, 11 vias

## Nets (pads, with @x,y where several pads share a name; then routed paths per layer and width w, separated by ;. In a path a pad name is that pad's centre, name@x,y a point inside that pad or via, vN(x,y) a via of type N, cw(c..) or ccw(c..) an arc to the next point about the centre after c; other vN are vias at no path point)
+24V: E1.A1 E1.A3 E1.B1 E1.B3 F6.2 | length 470.3
  Top Layer w9.84: E1.A1 3107.32,3345 3112.83,3339.49 3409.13,3339.49 3480,3268.62 F6.2
B3_RX: Bluetooth1.3 IC3.53 | length 1270.9
  Top Layer w9.84: IC3.53 1423.9,2743.9 v1@1450,2770
  Bottom Layer w9.84: Bluetooth1.3 1560,3535 1560,2870 v1(1455,2765) v1@1451.61,2761.61
B3_TX: Bluetooth1.4 IC3.54 | length 1295.9
  Top Layer w9.84: v1@1395,2780 1404.21,2770.79 IC3.54
  Bottom Layer w9.84: Bluetooth1.4 1540,3455 1540,2940 v1(1390,2790)
"BOOT SEL": P2.2 R5.2 | length 194.1
  Top Layer w9.84: R5.2 P2.2
"CAN Rx": IC1.4 IC3.33 | length 832.6
  Top Layer w9.84: IC3.33 2312.99,2272.36 2366.63,2326 IC1.4
"CAN Tx": IC1.5 IC3.34 | length 996
  Top Layer w9.84: IC3.34 1580.39,2291.06 1552.68,2291.06 1542.74,2281.12 1542.74,2259.58 1548.5,2253.82 2344.45,2253.82 2416.63,2326 IC1.5
CAN_N: E1.A8 E1.B2 IC1.15 R1.1 | length 641.4
  Top Layer w15: E1.B2 2427.5,3207.5 2427.5,2802.5 ; IC1.15 2466.63,2763.37 2427.5,2802.5 ; R1.1 2488.11,2849.13 2441.48,2802.5 2427.5,2802.5
CAN_P: E1.A6 E1.B4 IC1.17 S1.1 | length 2055.2
  Top Layer w15: E1.B4 2402.5,3207.5 2402.5,2798.66 2371.93,2768.09 2371.93,2727.42 IC1.17 v1(2366.63,2625.3) v1@2371.93,2620
  Bottom Layer w15: v1(2366.63,2625.3) 3076.93,1915 S1.1
CANGND: C5.1 C6.1 C7.1 E1.A2 E1.B8 E1.S1 E1.S2 E1.S3 FB2.1 IC1.11 IC1.13 IC1.16 IC1.18 IC1.20 S1.MH1 S1.MH2 S1.MH3 S1.MH4 | length 6534.8
  Top Layer w9.84: E1.B8 2285,3125 2285,2971.14 C6.1 ; IC1.20 2209.65,2729.11 2209.65,2774.78 2110,2874.43 2110,2895 2145.31,2930.32 2147.36,2930.32 2177.05,2960 C5.1 2276.14,2960 C6.1 ; IC1.18 2316.63,2810.38 2321.03,2814.77 2334.77,2814.77 2345,2825 2345,2920 2295,2970 C6.1 ; IC1.16 2421.81,2716.95 2421.81,2669.47 2441.28,2650 2519.61,2650 2566.63,2697.03 IC1.13 2566.63,2747.22 2592.07,2772.66 2641.2,2772.66 2666.63,2747.22 IC1.11 ; C7.1 3123.86,930 3299.38,1105.53 3302.26,1105.53 S1.MH4 S1.MH1 S1.MH2 ; FB2.1 3448.86,935 3462.64,948.78 3462.64,957.64 3593.23,1088.23 3593.23,1144.53 S1.MH3
  Bottom Layer w9.84: E1.S1 3550.08,3774.92 3645,3680 3645,2141.18 S1.MH2 S1.MH3 S1.MH4
CS_IMU: IC3.26 IMU1.3 | length 1785.6
  Top Layer w9.84: IC3.26 v1(1384.53,2290)
  Bottom Layer w9.84: IMU1.3 1384.53,677.87 v1(1384.53,2290)
CS_SD: IC3.25 SD1.3 | length 2060.9
  Top Layer w9.84: IC3.25 1364.84,1535 1425,1474.84 1425,805 1563.93,666.07 1618.93,666.07 1650,635 1650,412.88 1592.89,355.77 1592.89,317.89 SD1.3
Enable: Bluetooth1.1 IC3.52
GND: Bluetooth1.5 C1.1 C2.1 C3.1 C4.1 C9.2 C12.1 C13.1 C14.1 C15.1 C16.1 C17.1 C19.1 C20.1 C22.1 C23.1 C24.1 C25.2 C26.1 C27.1 C29.1 C30.2 C31.1 D1.1 E1.A5 E1.A7 E1.B5 E1.B7 GPS1.8 GPS2.8 IC1.1 IC1.3 IC1.7 IC1.9 IC1.10 IC3.12 IC3.18 IC3.31 IC3.47 IC3.63 IC4.4 IC4.7 IC4.9 IMU1.8 IMU2.1 IMU2.8 LED1.1 P1.3 P2.1 P3.2 P3.16 R4.1 RST1.1 RST1.2 SD1.8 SD2.8 SUSP1.3 SUSP2.3 USB1.5 | length 9409
  Top Layer w9.84: SUSP2.3 553.27,1463.11 626.14,1390.24 C20.1 C15.1 830.2,1390.24 847.34,1407.38 847.34,1411.2 886.14,1450 C26.1 ; C17.1@729.76,2823.86 C17.1 732.36,2812.4 732.36,2730.75 RST1.2 RST1.1 467.6,2708.11 420,2660.51 420,2560 515,2465 805,2465 865,2405 GPS2.8 901.1,2351.1 IC3.12 ; C19.1@1223.46,3302.05 C19.1 C19.1@1223.46,3307.95 ; C9.2 C24.1 C19.1@1223.46,3307.95 ; P2.1 1404.61,3140.39 1434.49,3140.39 1474.88,3100 1550,3100 1564.17,3114.17 1564.17,3120.31 1600,3156.14 C23.1 1694.76,3165 C22.1 1721.65,3181.42 1761.42,3181.42 1805,3225 1805,3278.01 1716.65,3366.36 1716.65,3419.37 R4.1@1701.89,3434.13 ; IC3.31 1482.95,2042.05 1575,1950 1575,1840 1545,1810 ; C12.1 1544.76,1809.76 1545,1810 ; C14.1 1703.9,2102.05 1745.94,2060 1745.94,1990 C13.1@1745,1989.06 ; C13.1 C13.1@1745,1989.06 ; LED1.1 2066.34,2343.23 2208.76,2343.23 IC1.1 2216.63,2376.2 2242.07,2401.63 2291.2,2401.63 2316.63,2376.2 IC1.3 ; C1.1 2075,989.76 SD2.8 2540,810 2714.49,635.51 2723.35,635.51 C27.1@2745,613.86 ; E1.B7 2125.87,3434.13 R4.1@1701.89,3434.13 ; P3.2@2227.34,2079.55 P3.2 ; IC1.7 2516.63,2326 2542.07,2300.57 2591.2,2300.57 IC1.9@2611.89,2321.26 ; C2.1 2611.89,2211.89 IC1.9@2611.89,2321.26 ; IC1.10 IC1.9 2611.89,2346.36 IC1.9@2611.89,2321.26 ; C27.1 C27.1@2745,613.86 ; C3.1 2750,827.28 C4.1 C30.2 2745,717.28 C27.1@2745,613.86 ; E1.A7 2765,2928.74 2809.88,2883.86 C29.1 2820,2864.88 2820,2825 2840,2805 2955.77,2805 2980,2829.23 2980,2938.23 3011.1,2969.33 3029.96,2969.33 IC4.4 ; IC4.7 3150.04,2969.33 3168.9,2969.33 3200,2938.23 3200,2835 3205.77,2829.23 3255.95,2829.23 C31.1 ; IC4.9 3310.31,3009.68 3335,2985 3335,2850 3320,2835 3280.42,2835 C31.1 ; 3228.76,2273.76 3228.76,2396.12 3265.31,2432.67 3338.45,2432.67 3375,2469.22 3375,2582.83 3357.99,2599.84 3312.56,2599.84 USB1.5 3213.92,2604.76 3198.68,2620 3234.79,2656.11 3234.79,2798.23 3256.45,2819.88 C31.1 ; C19.1@1223.46,3307.95 1243.15,3327.64 1268.31,3327.64 1350.67,3410 C25.2 1630,3410 1639.37,3419.37 1680.24,3419.37 R4.1 R4.1@1701.89,3434.13 ; 1545,1810 1665,1810 1685.31,1830.32 1685.31,1860.32 C16.1 1705,1941.14 1745,1981.14 C13.1@1745,1989.06
GPS_RX: GPS2.4 IC3.14 | length 698.7
  Top Layer w9.84: GPS2.4 472.89,2307.11 510.77,2307.11 546.81,2271.07 883.19,2271.07 923.85,2311.73 IC3.14
GPS_TX: GPS2.3 IC3.15 | length 805.3
  Top Layer w9.84: GPS2.3 372.89,2307.11 410.77,2307.11 464.64,2253.24 890.58,2253.24 929.39,2292.05 IC3.15
MISO: IC3.22 IMU1.5 P3.13 SD1.5 | length 3382.4
  Top Layer w9.84: IC3.22 1305.79,2095.45 1207.83,1997.49 1207.83,675 1303.41,579.42 1355.58,579.42 1373.93,561.07 1373.93,505.15 1337.89,469.11 1337.89,431.23 IMU1.5 1498.35,423.35 SD1.5
  Bottom Layer w9.84: SD1.5 1722.16,647.16 2000,647.16 2018.92,666.07 2136.07,666.07 2360,890 2360,1050 2310,1100
MOSI: IC3.23 IMU1.6 P3.14 SD1.6 | length 3401.1
  Top Layer w9.84: IC3.23 1325.47,2081.18 1227.34,1983.05 1227.34,1645.71 1401.18,1471.88 1401.18,793.82 SD1.6 SD1.6@1575,610
  Bottom Layer w9.84: IMU1.6 1575.02,568.37 1575.02,600.02 SD1.6 1728.93,753.93 2147.73,753.93 2235,841.19 2235,1120 2257.45,1142.45 2367.55,1142.45 2410,1100
NetBluetooth1_6: Bluetooth1.6 F5.2 | length 359.8
  Top Layer w9.84: F5.2 745,3648.62 815.87,3719.49 933.96,3719.49 974.47,3760 Bluetooth1.6
NetC8_1: C8.1 FB2.2 | length 119.5
  Top Layer w9.84: C8.1 3348.86,815 3396.02,862.17 FB2.2
NetC12_2: C12.2 IC3.30 | length 287.7
  Top Layer w9.84: IC3.30 1463.27,1941.65 1484.92,1920 C12.2
NetC28_1: C28.1 C29.2 IC4.2 IC4.3 L1.2 | length 2414.2
  Top Layer w9.84: v1(2775,1971.42) 2775,1776.89 L1.2 ; C28.1 2819.76,2986.14 v1(2850,2955.91) 2898.46,2907.44 2898.46,2896.65 C29.2 2941.77,2896.65 2941.77,2951.77 2979.02,2989.02 3029.96,2989.02 IC4.3 IC4.2
  Bottom Layer w9.84: v1(2775,1971.42) 2170,2576.42 2170,2725 2402.92,2957.92 2847.98,2957.92 v1(2850,2955.91)
NetC28_2: C28.2 IC4.1 | length 114.2
  Top Layer w9.84: C28.2 2940.63,3029.37 IC4.1 ; C28.2@2945,3009.49 C28.2@2945,3018.35
NetC31_2: C31.2 IC4.8 | length 141.1
  Top Layer w9.84: IC4.8 3150.04,2989.02 3177.64,2989.02 3214.88,2951.77 3243.65,2951.77 C31.2
NetD1_2: D1.2 R3.2 | length 70
  Top Layer w9.84: D1.2 R3.2
NetF1_2: F1.2 GPS1.7 | length 361.6
  Top Layer w9.84: F1.2 675.28,2080 746.14,2009.13 746.14,1829.63 755,1820.77 GPS1.7
NetF2_2: F2.2 GPS2.7 | length 759.1
  Top Layer w9.84: F2.2 265.87,2559.13 265.87,2459.13 280,2445 597.12,2445 719.23,2322.89 757.11,2322.89 GPS2.7
NetF3_2: F3.2 SD1.7 | length 302.2
  Top Layer w9.84: SD1.7@1580,705 SD1.7 1764.13,710 1835,639.13 F3.2
NetF4_2: F4.2 IMU1.7 | length 551.9
  Top Layer w9.84: F4.2 1074.01,645.55 1232.45,487.12 1232.45,320.9 IMU1.7
NetF6_1: F6.1 R7.1 | length 213.3
  Top Layer w9.84: R7.1 3411.65,3085 F6.1
NetIC3_60: IC3.60 R5.1 | length 256.1
  Top Layer w9.84: R5.1 1286.1,2893.9 IC3.60
NetIC4_6: IC4.6 R8.2 | length 120.6
  Top Layer w9.84: R8.2 3125.43,2906.22 3139.21,2920 3139.21,2949.65 3140.2,2950.63 IC4.6
NetIC4_10: IC4.10 R7.2 | length 102.2
  Top Layer w9.84: IC4.10 3157.91,3029.37 3191.89,3063.35 3209.37,3063.35 3224.13,3078.11 R7.2
NetLED1_2: LED1.2 R2.1 | length 177.1
  Top Layer w9.84: R2.1 1935,2330 LED1.2
NetLED2_1: LED2.1 R4.2 | length 120
  Top Layer w9.84: R4.2 LED2.1
NetR1_2: R1.2 S1.3 | length 1729.5
  Top Layer w9.84: R1.2@2485,2910 R1.2 v1(2625,2920)
  Bottom Layer w9.84: v1(2625,2920) 3510.48,2034.52 3510.48,1799.81 3471.15,1760.47 3471.15,1719.29 S1.3
NRST: C17.2 IC3.7 P1.5 RST1.3 RST1.4 | length 1523.1
  Top Layer w9.84: RST1.3 RST1.4 RST1.4@766.81,2590 ; P1.5 840,3135 C17.2 840,2708.31 789.45,2657.76 789.45,2612.64 RST1.4@766.81,2590 ; IC3.7 907.28,2449.53 RST1.4@766.81,2590
PA4: IC3.20 P3.8 | length 6.1
  Top Layer w9.84: P3.8@2225.68,1781.21 P3.8
PA8: IC3.41 P3.5
PA9: IC3.42 P3.4
PA10: IC3.43 P3.3
PB6: IC3.58 P3.7
PC6: IC3.37 P3.11
PC7: IC3.38 P3.10
PC8: IC3.39 P3.9
PC9: IC3.40 P3.6
SCLK: IC3.21 IMU1.4 P3.12 SD1.4 | length 3820.2
  Top Layer w9.84: IC3.21 1286.1,2100.98 1190,2004.88 1190,663.35 IMU1.4 1260,453.35 1260,333.93 1285.9,308.02 1285.9,305.32 1311.81,279.42 1434.42,279.42 1435,280 1455,280 SD1.4 SD1.4@1592.89,402.11
  Bottom Layer w9.84: IMU1.4 IMU1.4@1331.65,525 ; SD1.4 1590.77,415.77 1630.77,415.77 1768.93,553.93 2123.93,553.93 2185,615 2185,645 2475,935 2475,1135 2410,1200
State: Bluetooth1.2 LED2.2 | length 402.8
  Top Layer w9.84: Bluetooth1.2 1435,3769.81 1503.3,3838.11 1701.89,3838.11 1701.89,3750 LED2.2
SUSP1: IC3.27 SUSP1.2 | length 2297.2
  Top Layer w9.84: v1(1380,2370.79) 1450,2300.79 1450,2285 1404.21,2239.21 IC3.27
  Bottom Layer w9.84: SUSP1.2 580,750 1001.16,1171.16 1001.16,1960.26 1372.32,2331.42 1372.32,2363.1 v1(1380,2370.79)
SUSP2: IC3.9 SUSP2.2 | length 1391.3
  Top Layer w9.84: v1(1035,2400.59) 1044.57,2410.16 IC3.9
  Bottom Layer w9.84: SUSP2.2 798.93,1683.85 798.93,2164.52 v1(1035,2400.59)
SWO: IC3.55 P1.6 | length 1144.4
  Top Layer w9.84: P1.6 1014.32,3400.68 1014.32,3360.71 1095,3280.03 1095,2980 1155,2920 1155,2700 1188.82,2666.18 1188.82,2617.52 1236.34,2570 1369.23,2570 1384.53,2585.29 IC3.55
TCK: IC3.49 P1.2 | length 918.4
  Top Layer w9.84: P1.2 1107.82,2907.18 1107.82,2698.52 1134.95,2671.39 1134.95,2617.13 1162.08,2590 1185,2590 1250,2525 1420,2525 1473.97,2578.97 1473.97,2590 1501.65,2617.68 1501.65,2645.39 IC3.49
TMS: IC3.46 P1.4 | length 1280.3
  Top Layer w9.84: v1@1450,2475 v1(1455,2480) 1503.27,2528.27 IC3.46
  Bottom Layer w9.84: P1.4 1000.71,3195.71 965.71,3195.71 910,3140 910,2830 930,2810 1125,2810 v1(1455,2480)
"USER LED": IC3.36 R2.2 | length 113.3
  Top Layer w9.84: IC3.36 1692.72,2331.42 R2.2
VCC: C3.2 C4.2 C27.2 C30.1 F2.1 F5.1 IC1.8 IC2.4 IC4.5 L1.1 P3.1 R3.1 R8.1 USB1.1 | length 3938.3
  Top Layer w9.84: F2.1 195,3286.65 305,3396.65 F5.1 ; IC1.8 2566.63,2376.2 2639.96,2449.53 2695,2449.53 2930,2214.53 2930,1630 2870.94,1570.94 L1.1 2772.58,1570.94 2740,1538.37 2740,1379 2705,1344 IC2.4 2705,1309.55 2799.55,1215 2910,1215 2945,1180 2945,1079.53 2860.24,994.76 C3.2 2860.24,827.28 C4.2 C30.1 2857.95,607.72 C27.2 ; IC4.5 3038.82,2950.63 3039.8,2949.65 3039.8,2859.76 R8.1 3054.57,2705.43 ; R3.1@3165,2402.56 R3.1 3190.08,2400.59 3268.27,2478.78 USB1.1
VIO: C1.2 C2.2 C9.1 C13.2 C14.2 C15.2 C16.2 C19.2 C20.2 C22.2 C23.2 C24.2 C25.1 C26.2 F1.1 F3.1 F4.1 IC1.6 IC2.6 IC2.7 IC3.1 IC3.13 IC3.19 IC3.32 IC3.48 IC3.64 P1.1 P2.3 P3.15 SUSP1.1 SUSP2.1 | length 7560.8
  Top Layer w9.84: F1.1 F1.1@903.62,2080 ; P1.1 P1.1@1015,2900 ; IC3.13 1129.61,2330.43 1165.63,2330.43 ; IC3.1 1177.36,2567.64 1205,2540 1205,2369.8 1165.63,2330.43 ; IC3.19 1246.73,2249.33 1205,2291.06 ; C25.1 1350.67,3520.24 1310.71,3560.2 1193.62,3560.2 1186.22,3552.79 1186.22,3552.64 1156.54,3522.95 C9.1 C24.2 C19.2 1176.22,3285.31 1176.22,3168.78 P2.3 1184.32,3169.32 1224.29,3169.32 1314.97,3260 1403.62,3260 C23.2@1489.76,3173.86 ; C23.2 C23.2@1489.76,3173.86 ; IC3.32 1502.64,2152.36 1530.31,2124.68 1530.31,2121.73 C14.2 1569.69,2082.36 1569.69,2063.94 1634.76,1998.86 C13.2 1634.76,1883.31 C16.2 ; C22.2 1695,3265 1515,3265 1489.76,3239.76 C23.2@1489.76,3173.86 ; F3.1 1793.93,353.93 1793.93,333.93 1620,160 1420,160 1405,175 1190,175 1074.01,290.99 F4.1 1034.84,480 611.97,480 SUSP1.1 408.29,683.68 408.29,1168.29 410,1170 410,1176.81 SUSP2.1 573.03,1226.89 626.14,1280 C20.2 C15.2 830.2,1280 847.34,1297.15 847.34,1300.96 886.14,1339.76 C26.2 903.86,1339.76 925.51,1361.42 925.51,1370.28 975,1419.76 975,1890 974.49,1890.51 974.49,2009.13 F1.1@903.62,2080 ; C1.2 2304.76,994.76 2310,1000 2375,935 2594,935 2755,1096 IC2.6 IC2.7 ; IC1.6 2466.63,2203.6 C2.2 ; F1.1@903.62,2080 1044.59,2220.96 1134.9,2220.96 1205,2291.06 ; 1165.63,2330.43 1205,2291.06
  Bottom Layer w9.84: P1.1 1180,3075 P2.3
VISOIN: C5.2 C6.2 C8.2 FB1.2 IC1.19 | length 398.8
  Top Layer w9.84: C5.2 2191.65,2881.42 2264.49,2881.42 C6.2 2266.63,2840.26 IC1.19 ; FB1.2 3330.24,935 C8.2 C8.2@3350,935.24
VISOOUT: C7.2 FB1.1 IC1.12 | length 239.7
  Top Layer w9.84: v1@2616.63,2610 IC1.12 ; C7.2 3173.74,819.76 3216.14,862.17 FB1.1
  other v1: 2616.63,2620
pads on no net: E1.A4 E1.B6 E1.MH1 E1.MH2 GPS1.1 GPS1.2 GPS1.3 GPS1.4 GPS1.5 GPS1.6 GPS2.1 GPS2.2 GPS2.5 GPS2.6 IC1.2 IC1.14 IC2.1 IC2.2 IC2.3 IC2.5 IC2.8 IC3.2 IC3.3 IC3.4 IC3.5 IC3.6 IC3.8 IC3.10 IC3.11 IC3.16 IC3.17 IC3.24 IC3.28 IC3.29 IC3.35 IC3.44 IC3.45 IC3.50 IC3.51 IC3.56 IC3.57 IC3.59 IC3.61 IC3.62 IC4.11 IMU1.1 IMU1.2 IMU2.2 IMU2.3 IMU2.4 IMU2.5 IMU2.6 IMU2.7 S1.2 S1.4 SD1.1 SD1.2 SD2.1 SD2.2 SD2.3 SD2.4 SD2.5 SD2.6 SD2.7 SUSP1.MH1 SUSP2.MH1 USB1. USB1.2 USB1.3 USB1.4
copper on no net: | length 50.5
  Top Layer w15: 3261.83,2503.84 3268.27,2510.28 3307.64,2510.28 ; 3306.2,2543.21 3307.64,2541.77

## Text inside footprints (layer, text, board x,y; h text height)
P3: Top Overlay "16" at 2210,1316.89 h50 r270; Top Overlay "15" at 2110,1316.89 h50 r270; Top Overlay "1" at 2110,2176.89 h50 r270; Top Overlay "2" at 2210,2176.89 h50 r270